# EAGLE board promini2via (EAGLE 9.6.2)
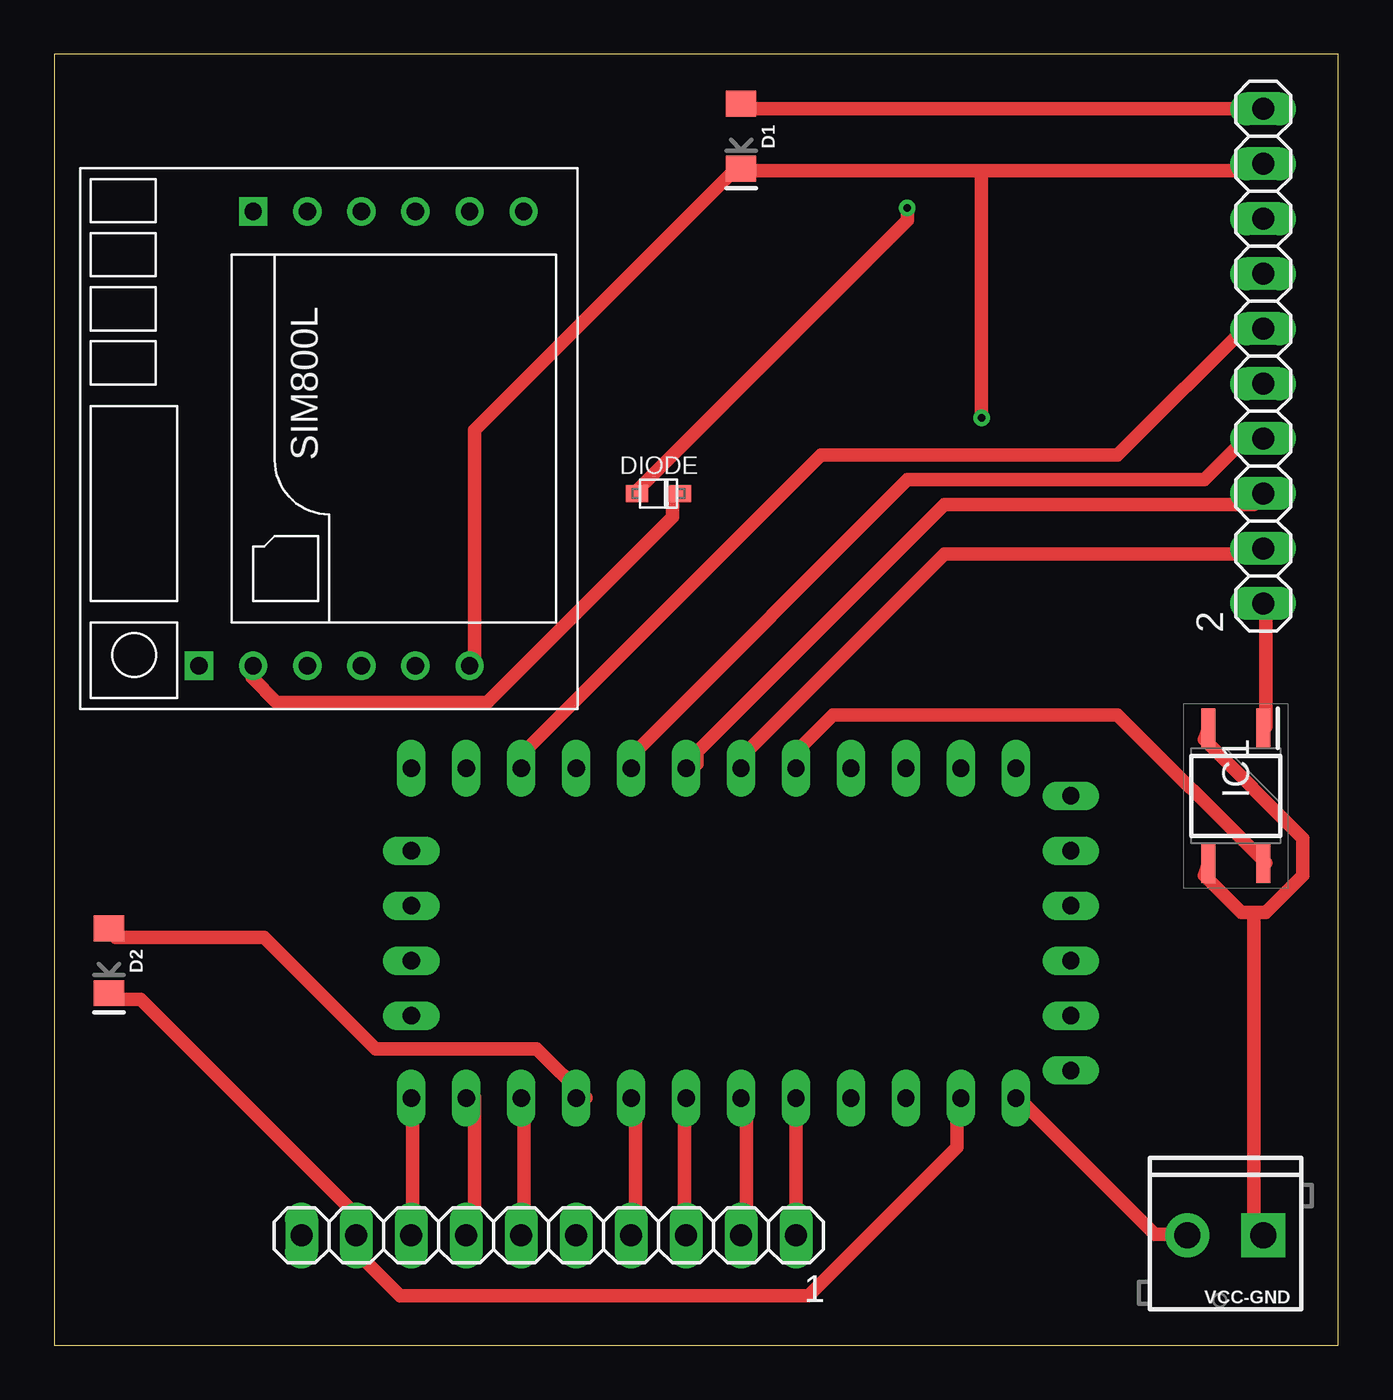
[diagram p0: board, top side]
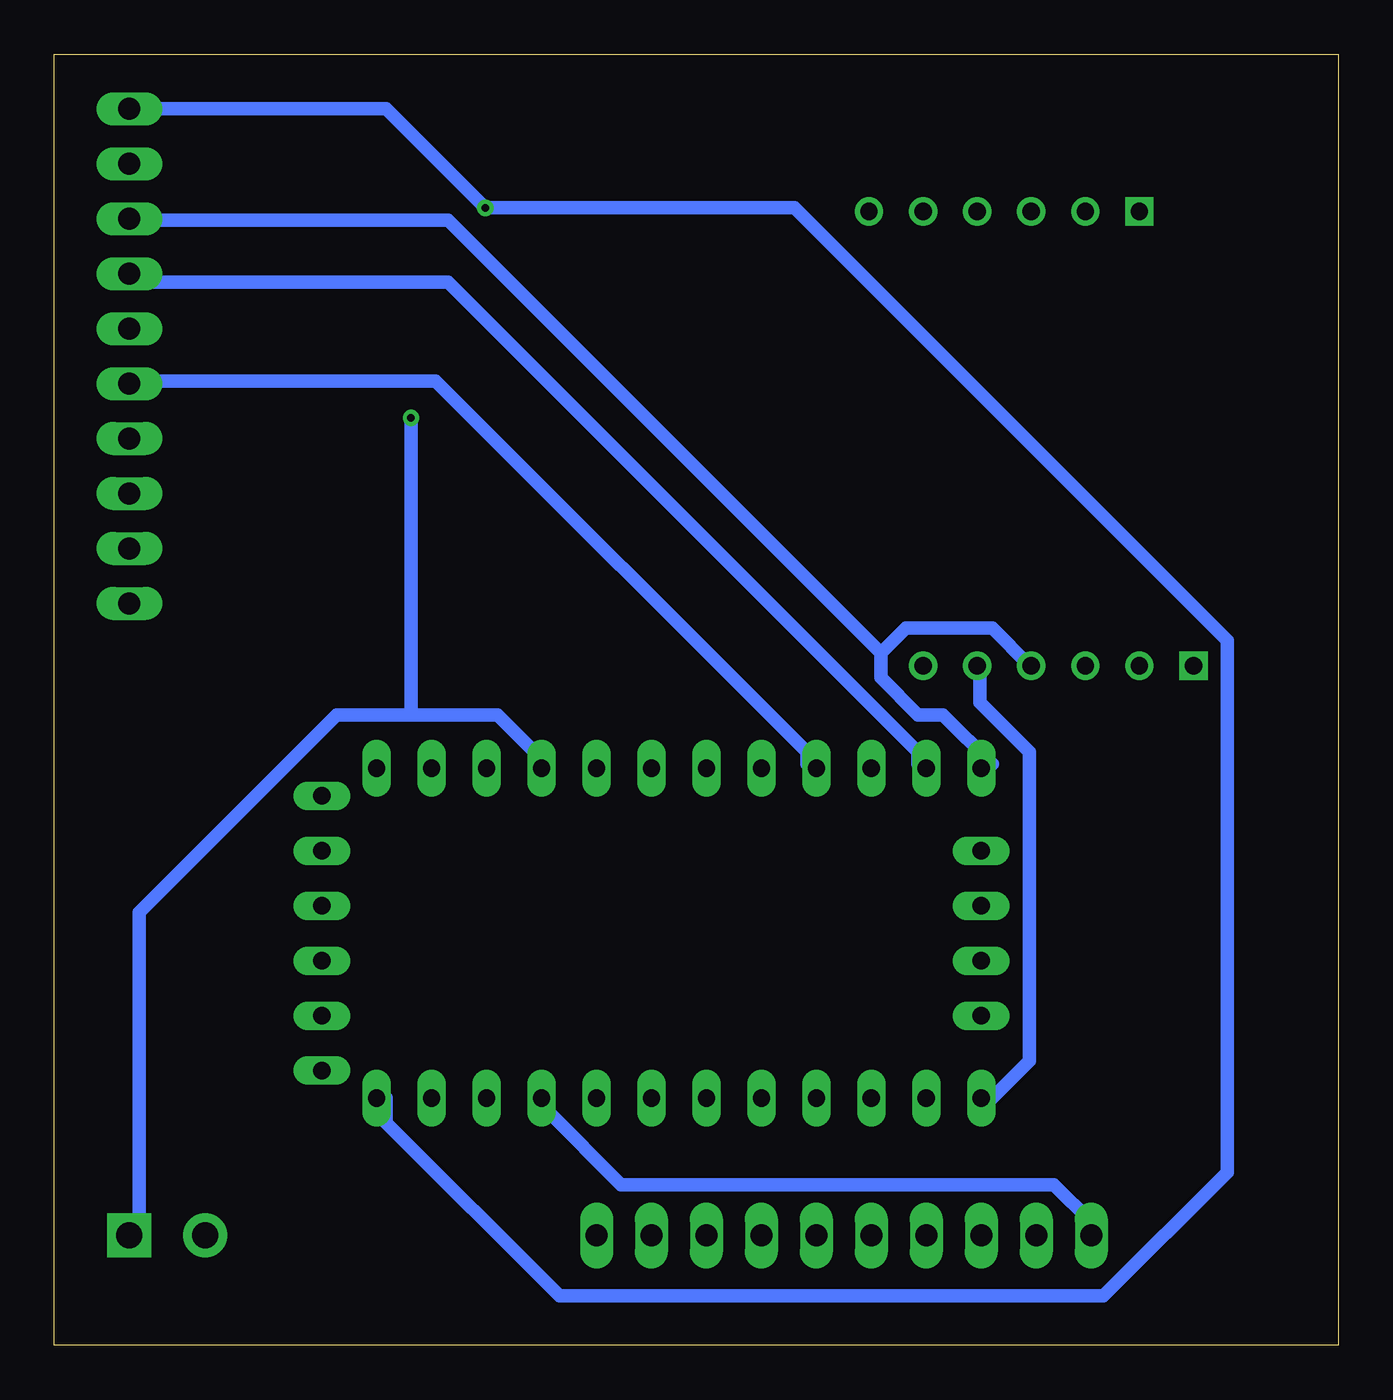
[diagram p1: board, bottom side, seen from below]

Size 59.36 x 59.68 mm. Coordinates in mm from the lower left corner, seen from the top.
Outline: 0,0 59.36,0 59.36,59.68 0,59.68 0,0
Copper layers (1*16): Top 0.035mm / dielectric 1.5mm / Bottom 0.035mm
Design rules "default *": minimum track width 25mil, minimum drill 0.35mm, track to track 20mil, track to pad 20mil, pad to pad 6mil, via to via 6mil, smd to smd 6mil, copper to edge 40mil, drill to drill 6mil, minimum pad ring 10mil, minimum via ring 8mil, stop-mask expansion 4mil, vias tented up to drill 0mil, thermal gap 10mil

## Footprints (pad centres in the part's own frame; a part is rotated, then mirrored left to right if it is on the bottom)
1X10 = drill 1.016 long: 1 -11.43,0; 2 -8.89,0; 3 -6.35,0; 4 -3.81,0; 5 -1.27,0; 6 1.27,0; 7 3.81,0; 8 6.35,0; 9 8.89,0; 10 11.43,0
LED-1206 = smd 1.2 x 1.4: A -1.5,0; C 1.5,0
SOD-323F = smd 1 x 0.8: A -1,0; C 1,0
SOP254P700X200-4N = smd 1.825 x 0.65: 1 -3.112,1.27; 2 -3.112,-1.27; 3 3.112,-1.27; 4 3.112,1.27
PRO-MINI = drill 0.8 long: A0 8.89,8.89; A1 8.89,11.43; A2 8.89,13.97; A3 8.89,16.51; A4 -2.54,-1.27; A5 0,-1.27; A6 2.54,-1.27; A7 5.08,-1.27; D2 -6.35,16.51; D3 -6.35,13.97; D4 -6.35,11.43; D5 -6.35,8.89; D6 -6.35,6.35; D7 -6.35,3.81; D8 -6.35,1.27; D9 -6.35,-1.27; D10 8.89,-1.27; D11 8.89,1.27; D12 8.89,3.81; D13 8.89,6.35; DTR 7.62,29.21; GND 8.89,24.13; GND1 -6.35,19.05; GND2 -5.08,29.21; GND3 -2.54,29.21; RAW 8.89,26.67; RST 8.89,21.59; RST1 -6.35,21.59; RX1 -6.35,24.13; RX1-1 2.54,29.21; TX0 -6.35,26.67; TX0-1 5.08,29.21; VCC 8.89,19.05; VCC1 0,29.21
SIM800LMODULE = drill 0.8: DTR 10.5,1; GND -10.5,-6.5; MIC+ 10.5,-1.5; MIC- 10.5,-4; RST -10.5,1; RX -10.5,-1.5; SPK+ 10.5,-6.5; SPK- 10.5,-9; TX -10.5,-4; VCC -10.5,3.5 | drill 0.8 square: NET -10.5,6; RING 10.5,3.5
SCREWTERMINAL-3.5MM-2 = drill 1.2 pad 2.032 square: 1 0,0 | drill 1.2 pad 2.032: 2 3.5,0

## Placement (x,y rotation side)
1  [1X10]  22.86,5.08 180 top
2  [1X10]  55.88,45.72 90 top
D1  RED  [LED-1206]  31.75,55.88 270 top
D2  RED  [LED-1206]  2.54,17.78 270 top
DIODE  [SOD-323F]  27.94,39.37 0 top
IC1  EL357N-B-TA-G  [SOP254P700X200-4N]  54.61,25.4 270 top
PROMINI  PRO-MINI  [PRO-MINI]  17.78,20.32 270 top
U$1  SIM800LMODULE  [SIM800LMODULE]  12.7,41.91 90 top
VCC-GND  [SCREWTERMINAL-3.5MM-2]  55.88,5.08 180 top

## Library data of the parts
1 2 = pinhead
D1 D2 = SparkFun-LED; PROD_ID: DIO-09912
DIODE = adafruit
IC1 = EL357N-B-TA-G; DESCRIPTION: Optoisolator Transistor Output 3750Vrms 1 Channel 4-SOP (2.54mm); HEIGHT: 2mm; MANUFACTURER_NAME: Everlight Elec; MANUFACTURER_PART_NUMBER: EL357N-B-TA-G
PROMINI = Arduino-clone
U$1 = SIM800LMODULE
VCC-GND = SparkFun-Retired; PROD_ID: CONN-08399

## Nets
D2,D3,D4,D5-IO0,D6-IO2,D7-IO4,D8-IO5,D9-IO9,GND,VIN: 2.6 PROMINI.D7
N$1: 2.10 D1.A DIODE.A PROMINI.RAW VCC-GND.2
N$3: DIODE.C U$1.VCC
N$4: 1.10 PROMINI.VCC
N$5: IC1.4 PROMINI.D2
N$6: 2.8 PROMINI.D9 U$1.RX
N$8: 2.1 IC1.1
N$9: 2.2 PROMINI.D3
N$10: 2.3 PROMINI.D4
N$11: 2.4 PROMINI.D5
N$12: 2.5 PROMINI.D6
N$14: 2.7 PROMINI.D8
N$16: 1.1 PROMINI.A3
N$17: 1.2 PROMINI.A2
N$18: 1.3 PROMINI.A1
N$19: 1.4 PROMINI.A0
N$20: D2.A PROMINI.D13
N$21: 1.6 PROMINI.D12
N$22: 1.7 PROMINI.D11
N$23: 1.8 PROMINI.D10 U$1.TX
N$24: 1.9 D2.C PROMINI.GND
N$26: 2.9 D1.C IC1.2 IC1.3 PROMINI.GND1 U$1.GND VCC-GND.1

## Tracks (layer width: path | path; a pad name or v marks a point on that pad's centre or on a via)
D2,D3,D4,D5-IO0,D6-IO2,D7-IO4,D8-IO5,D9-IO9,GND,VIN
  Top 0.635: PROMINI.D7 21.72,26.86 21.72,27.43 35.43,41.15 49.15,41.15 55.44,47.43 2.6
N$1  (via drill 0.35)
  Top 0.635: PROMINI.RAW 44.58,11.43 50.86,5.14 52.01,5.14 VCC-GND.2 | v39.43,52.58 39.43,52.01 26.86,39.43 DIODE.A | 2.10 32,57.15 D1.A
  Bottom 0.635: 2.10 44.01,57.15 v39.43,52.58 25.15,52.58 5.14,32.58 5.14,8 10.86,2.29 36.01,2.29 44.01,10.29 44.01,11.43 PROMINI.RAW
N$3
  Top 0.635: DIODE.C 28.57,39.43 28.57,38.29 20,29.72 10.29,29.72 9.14,30.86 U$1.VCC
N$4
  Bottom 0.635: 1.10 11.43,5.71 13.14,7.43 33.15,7.43 36.58,10.86 36.58,11.43 PROMINI.VCC
N$5
  Top 0.635: PROMINI.D2 34.29,27.43 36.01,29.15 49.15,29.15 56.01,22.29 IC1.4
N$6
  Bottom 0.635: 21.14,32 20,33.15 16,33.15 14.29,31.43 U$1.RX | 21.14,32 21.14,30.86 19.43,29.15 18.29,29.15 16,26.86 PROMINI.D9 | 21.14,32 41.15,52.01 55.44,52.01 2.8
N$8
  Top 0.635: IC1.1 56.01,28.57 56.01,34.29 2.1
N$9
  Top 0.635: PROMINI.D3 32,26.86 32,27.43 41.15,36.58 55.44,36.58 2.2
N$10
  Top 0.635: PROMINI.D4 29.72,26.86 29.72,27.43 41.15,38.86 55.44,38.86 2.3
N$11
  Top 0.635: PROMINI.D5 26.86,26.86 26.86,27.43 39.43,40.01 53.15,40.01 55.44,42.29 2.4
N$12
  Bottom 0.635: PROMINI.D6 24.57,26.86 24.57,27.43 41.72,44.58 55.44,44.58 2.5
N$14
  Bottom 0.635: PROMINI.D8 19.43,26.86 19.43,27.43 41.15,49.15 55.44,49.15 2.7
N$16
  Top 0.635: 1.1 PROMINI.A3
N$17
  Top 0.635: PROMINI.A2 32,11.43 32,5.14 1.2
N$18
  Top 0.635: PROMINI.A1 29.15,11.43 29.15,5.14 1.3
N$19
  Top 0.635: PROMINI.A0 26.86,11.43 26.86,5.14 1.4
N$20
  Top 0.635: D2.A 2.86,18.86 9.72,18.86 14.86,13.72 22.29,13.72 24.57,11.43 PROMINI.D13
N$21
  Top 0.635: PROMINI.D12 21.72,11.43 21.72,5.14 1.6
N$22
  Top 0.635: PROMINI.D11 19.43,11.43 19.43,5.14 1.7
N$23
  Top 0.635: PROMINI.D10 16.57,11.43 16.57,5.14 1.8
  Bottom 0.635: U$1.TX 16.57,30.86 16.57,29.72 14.29,27.43 14.29,13.14 16,11.43 PROMINI.D10
N$24
  Top 0.635: D2.C 2.86,16 4,16 13.72,6.29 13.72,5.14 1.9 13.72,4.57 16,2.29 34.86,2.29 41.72,9.14 41.72,11.43 PROMINI.GND
N$26  (via drill 0.35)
  Top 0.635: 55.44,20 56.01,20 57.72,21.72 57.72,23.43 53.15,28 IC1.2 | 55.44,20 54.86,20 53.15,21.72 IC1.3 | 55.44,20 55.44,5.14 VCC-GND.1 | 42.86,54.29 55.44,54.29 2.9 | 42.86,54.29 32,54.29 D1.C 31.43,54.29 19.43,42.29 19.43,31.43 U$1.GND | 42.86,54.29 v42.86,42.86
  Bottom 0.635: 42.86,29.15 46.29,29.15 55.44,20 55.44,5.14 VCC-GND.1 | 42.86,29.15 38.86,29.15 37.15,27.43 37.15,26.86 PROMINI.GND1 | v42.86,42.86 42.86,29.15